# Altium PCB PCB.PcbDoc
Units mil, origin at the board's own origin, x right, y up, seen from the top; angles counter-clockwise.
Board outline 1620 x 1205 mil, 2 copper layers (Top Layer, Bottom Layer), stack 54.768 mil thick; 21 components, 14 nets, 72 pads, 112 vias.
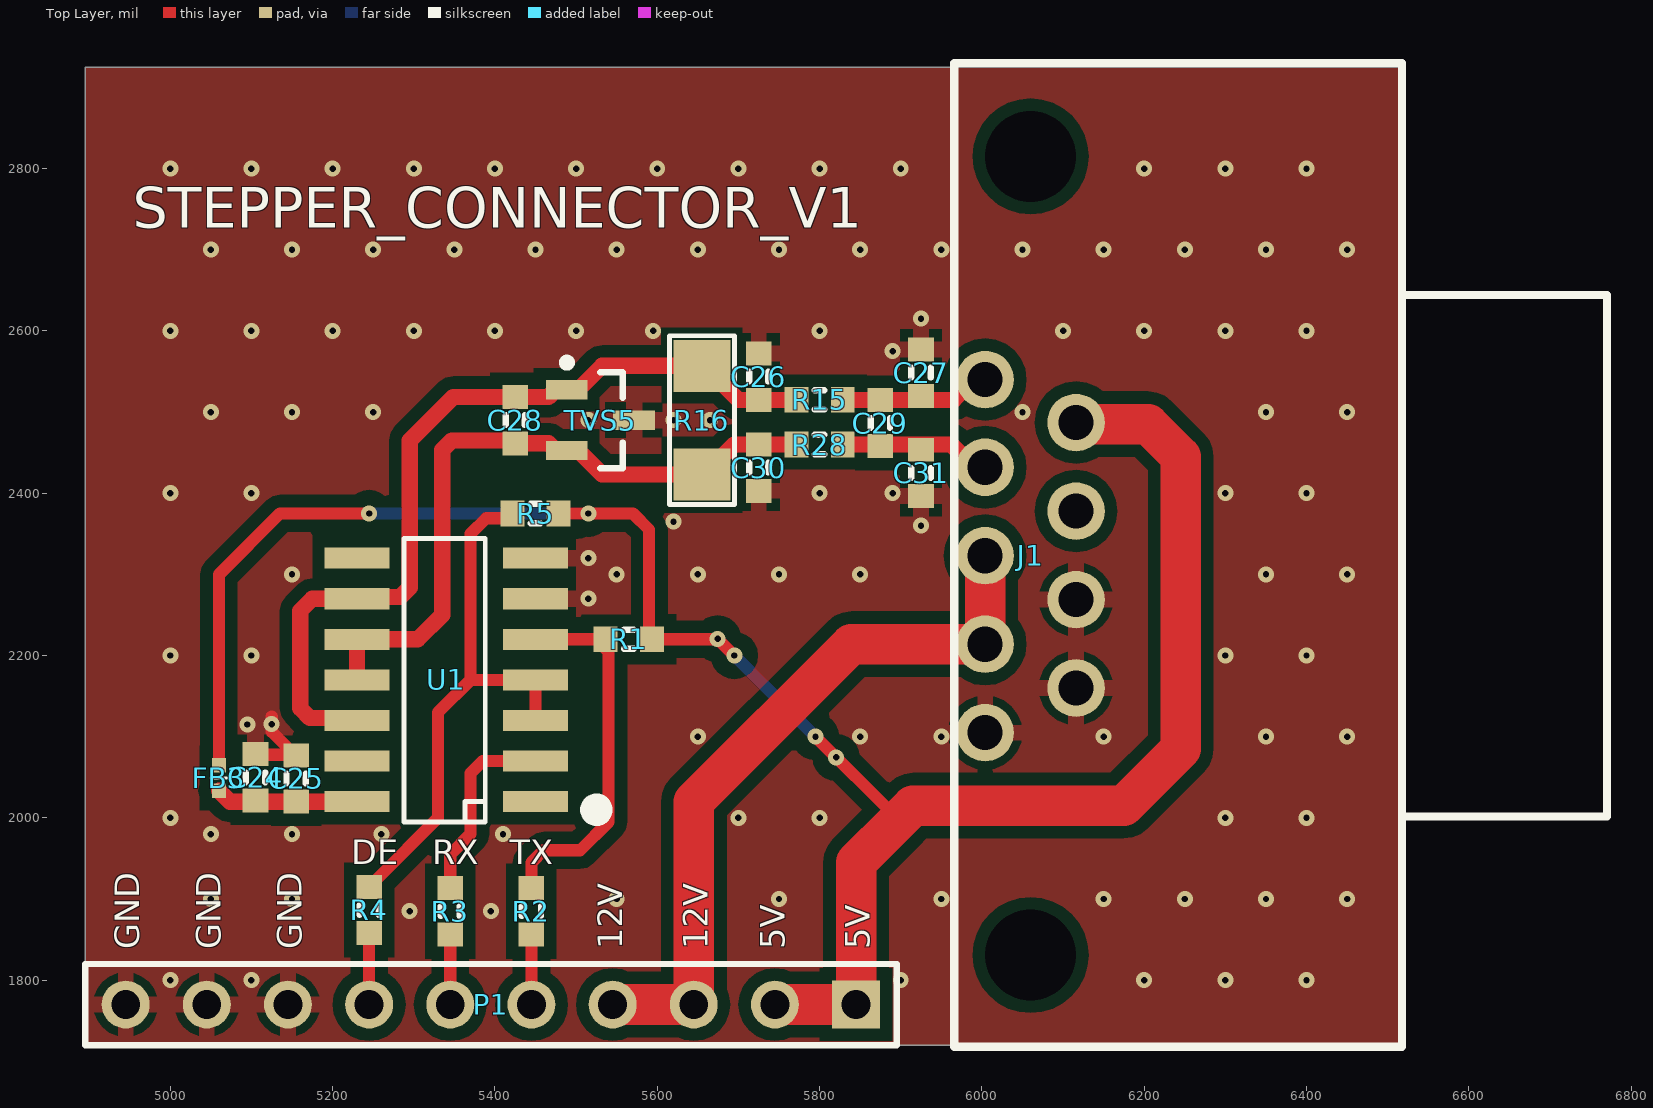
[diagram p0: Top Layer view]
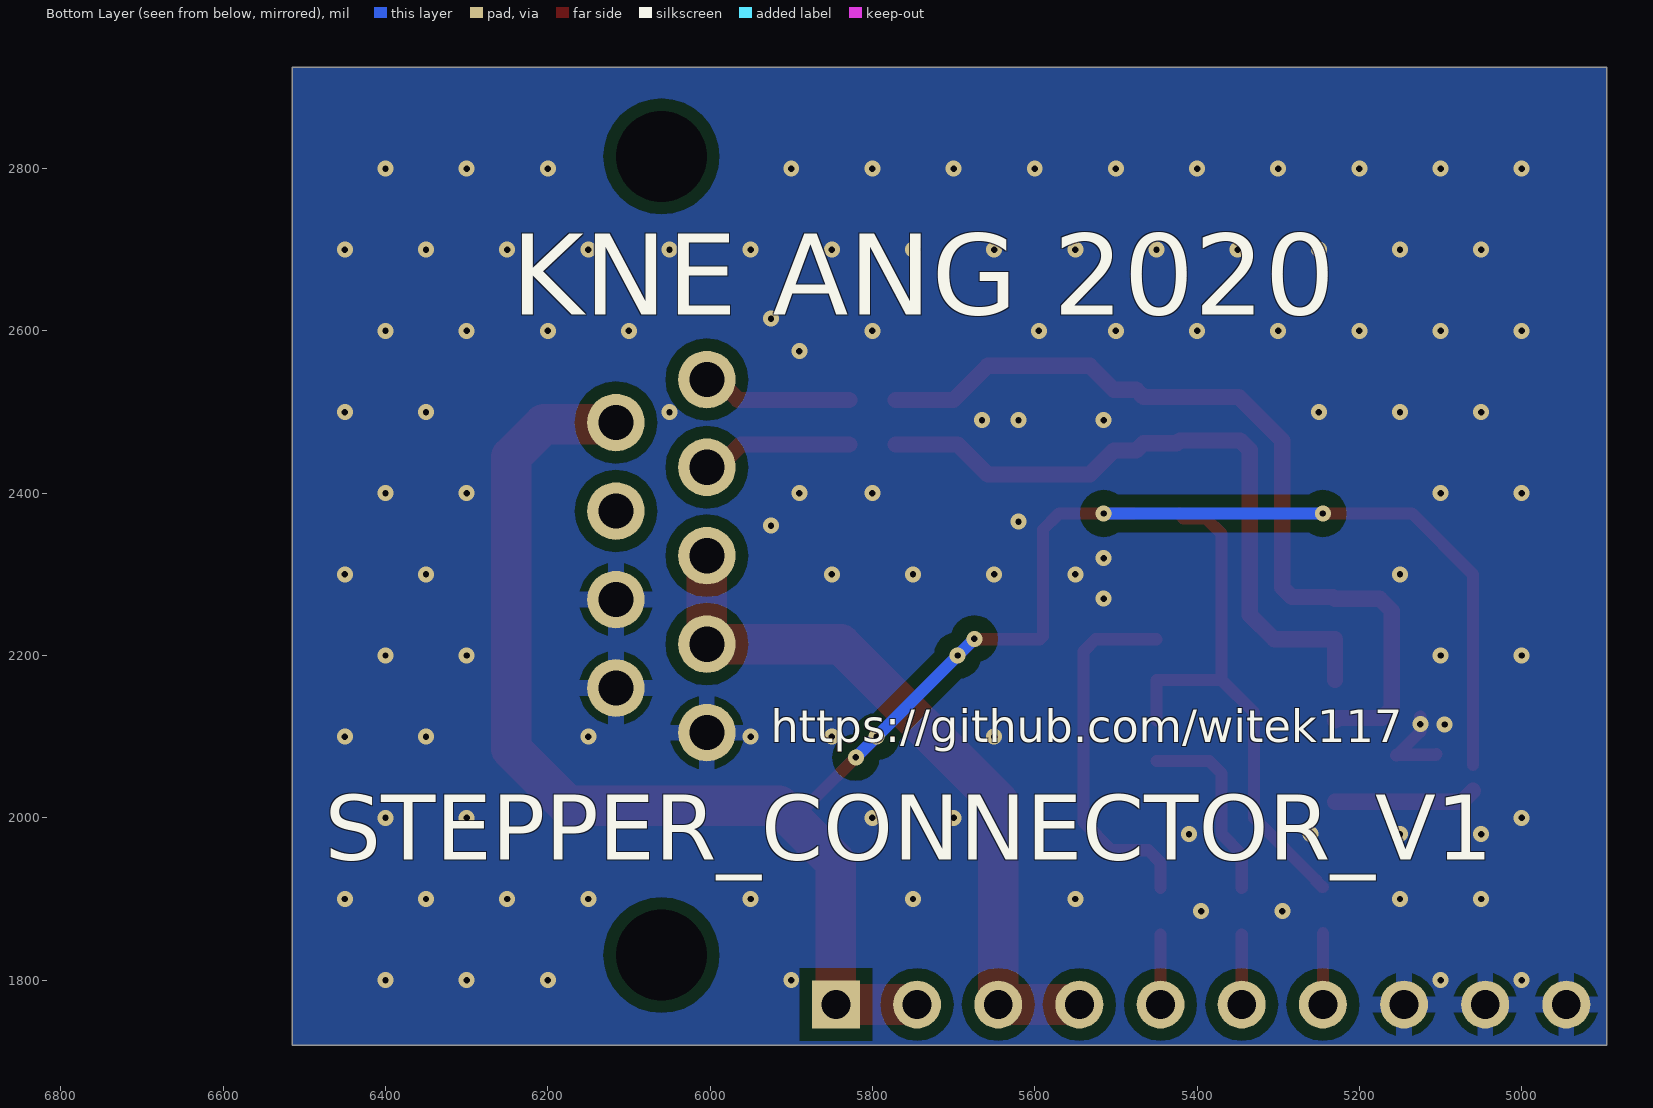
[diagram p1: Bottom Layer view, seen from below]
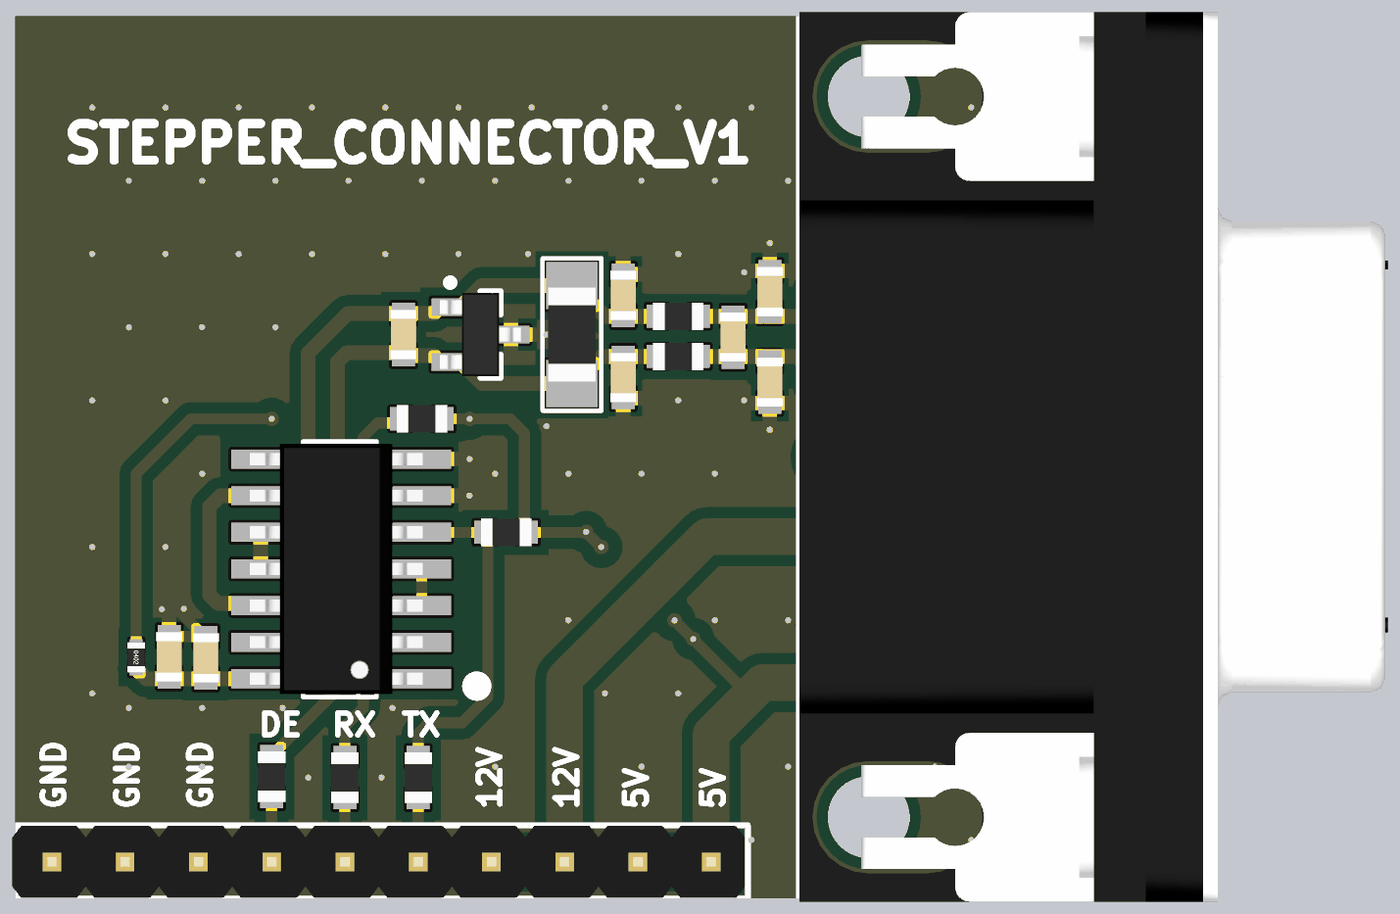
[diagram p2: 3D render of the assembled board from above, using the file's embedded part models]

## Layer stack, top to bottom
Top Solder: solder mask 0.4, Solder Resist, Dk 3.5
Top Layer: signal copper 1.4
Dielectric 1: dielectric 51.9685, FR-4, Dk 4.8
Bottom Layer: signal copper 1.4
Bottom Solder: solder mask 0.4, Solder Resist, Dk 3.5

## Board outline
4895,1720 6515,1720 6515,2925 4895,2925

## Design rules (kind name [scope] priority, off if disabled: settings)
Clearance [All] p1: gap=5 ignorepadtopadclearanceinfootprint=FALSE except(15: Arc-Poly Track-Poly SMDPad-Poly THPad-Poly Via-Poly Fill-Poly Poly-Poly Poly-Region Poly-Text Poly-Hole)
HoleSize [All] p1: absolutevalues=TRUE maxlimit=157.48 minlimit=1 maxpercent=80.000 minpercent=20.000
MinimumSolderMaskSliver [All] p1: minsoldermaskwidth=2
PolygonConnect PolygonConnect_via [IsVia] p1: connectstyle=Direct reliefconductorwidth=20 reliefentries=4 polygonreliefangle="90 Angle" airgapwidth=10
PolygonConnect [All] p2: connectstyle=Relief reliefconductorwidth=20 reliefentries=4 polygonreliefangle="90 Angle" airgapwidth=10
RoutingVias [All] p1: holewidth=28 width=50 viastyle="Through Hole" minholewidth=7.87 minwidth=19.68 maxholewidth=157.48 maxwidth=157.48
SilkToSilkClearance [All] p1: silktosilkclearance=5
SilkToSolderMaskClearance [IsPad] p1: minsilkscreentomaskgap=2 clearancetoexposedcopper=TRUE
SolderMaskExpansion [All] p1: expansion=4 istentingtop=FALSE
Width [All] p1: maxlimit=50 minlimit=6 preferedwidth=10
26 further rules are at their usual default settings.

## Classes and differential pairs
component class top: J1 P1 R1 R2 R3 R4 R5
component class Designator: C24 C25 FB3 U1

## Components (designator, comment, footprint, x,y, rotation, side; value= is the part's Value field where it differs from the comment)
C24 "Ceramic X7R" C_0603_1608 5105,2050 r90 top value=1uF
C25 "Ceramic X7R" C_0603_1608 5155,2048.54 r90 top value=100nF
C26 "Ceramic C0G" C_0603_1608 5725,2543.54 r90 top value=1nF
C27 "Ceramic C0G" C_0603_1608 5925,2548.54 r90 top value=100pF
C28 "Ceramic C0G" C_0603_1608 5425,2490 r270 top value=1nF
C29 "Ceramic C0G" C_0603_1608 5875,2486.46 r270 top value=100pF
C30 "Ceramic C0G" C_0603_1608 5725,2431.46 r270 top value=1nF
C31 "Ceramic C0G" C_0603_1608 5925,2425 r270 top value=100pF
FB3 "Ferrite bead" FB_0402_1005 5060,2049.25 r270 top value=BLM15EG121SH1D
J1 "DSUB 9 Pin" J_DSUB_MHDD9F-T-B-S-RBM 6060,2323 r90 top value=MHDD9F-T-B-S-RBM
P1 "Goldpin" P_HEADER_1x10_2.54 5845,1770 r180 top value=DS1021-1*10SF11
R1 "Resistor" R_0603_1608 5565,2220 r0 top value=100k
R2 "Resistor" R_0603_1608 5445,1885 r90 top value=10R
R3 "Resistor" R_0603_1608 5345,1885 r270 top value=10R
R4 "Resistor" R_0603_1608 5245,1886.46 r90 top value=10R
R5 "Resistor" R_0603_1608 5450,2375 r180 top value=10k
R15 "Resistor" R_0603_1608 5800,2515 r180 top value=10R
R16 "Resistor" R_1206_3216 5655,2490 r90 top value=120R
R28 "Resistor" R_0603_1608 5800,2460 r180 top value=10R
TVS5 "TVS double bidirectional" SOT23_N 5530,2490 r0 top value=CDSOT23-SM712
U1 "MAX3076 Series 16 Mbps 6 V Full Duplex SMT RS 485 Transceiver - SOIC-14" SOP14_SO14_SOIC14_4X9X18 5340,2170 r90 top value=MAX3076EASD+

## Footprints (in the part's own frame and the unit in brackets; to place one, negate y for a bottom-side part, rotate by r counter-clockwise, add the part's x,y. Pads: shape width x height; smd on the part's side, far side on the other; paste and mask are expansions set on the pad)
C_0603_1608 [mm]
  rect 0.75x0.8 smd: 1(-0.725,0) 2(0.725,0)
  silkscreen extent -0.15,-0.3 0.15,0.3, body extent -0.85,-0.45 0.85,0.45, height 0.89
FB_0402_1005 [mm]
  rect 0.45x0.45 smd: 1(-0.4,0) 2(0.4,0)
  silkscreen extent 0,-0.25 0,0.25, body extent -0.52,-0.3 0.52,0.3, height 0.34
J_DSUB_MHDD9F-T-B-S-RBM [mm] "D-SUB; 9 Position; Female"
  round 1.8 hole 1.1: 1(5.512,1.422) 2(2.769,1.422) 3(0,1.422) 4(-2.769,1.422) 5(-5.537,1.422) 6(4.166,-1.422) 7(1.397,-1.422) 8(-1.372,-1.422) 9(-4.14,-1.422)
  round 1.524 hole 2.845 unplated: DNC(-12.497,0) DNC(12.497,0)
  silkscreen extent -15.37,-18.04 15.42,2.39, body extent -15.42,-18 15.42,2.4, height 12.5
P_HEADER_1x10_2.54 [mm] "Connector; Header; 10 Position; Male"
  rect 1.5x1.5 hole 0.9: 1(0,0)
  round 1.5 hole 0.9: 2(2.54,0) 3(5.08,0) 4(7.62,0) 5(10.16,0) 6(12.7,0) 7(15.24,0) 8(17.78,0) 9(20.32,0) 10(22.86,0)
  silkscreen extent -1.27,-1.27 24.13,1.27, body extent -1.17,-1.25 24.23,1.25, height 8.2
R_0603_1608 [mm]
  rect 0.75x0.8 smd: 1(-0.725,0) 2(0.725,0)
  silkscreen extent -0.15,-0.3 0.15,0.3, body extent -0.87,-0.47 0.88,0.48, height 0.54
R_1206_3216 [mil]
  rect 64x70 smd: 1(-67,0) 2(67,0)
  silkscreen extent -104,-40 104,40, body extent -64,-32 64,32, height 27
SOP14_SO14_SOIC14_4X9X18 [mil]
  rect 26x80 smd: 1(-150,-110) 2(-100,-110) 3(-50,-110) 4(0,-110) 5(50,-110) 6(100,-110) 7(150,-110) 8(150,110) 9(100,110) 10(50,110) 11(0,110) 12(-50,110) 13(-100,110) 14(-150,110)
  silkscreen extent -175,-195 174,52, body extent -171,-111 171,125, height 67
SOT23_N [mm] "SOT23, 3-Leads, Body 2.9x1.3mm, Pitch 0.95mm, Lead Span 2.3mm, IPC Medium Density"
  rect 1.3x0.6 smd: 1(-1.05,0.95) 2(-1.05,-0.95) 3(1.05,0)
  silkscreen extent -1.17,-1.5 0.7,1.92, body extent -1.4,-1.45 1.4,1.45, height 1.29

## Part data
C24: library part C_1uF_25V_X7R_0603_10, "Capacitor", Dielectric=X7R, Manufacturer=Samsung, Manufacturer Part Number=CL10B105KA8NNNC, Tolerance (%)=10, Voltage=25V, HelpURL=http://www.tme.eu/pl/Document/4a42202b32dab16128fe107dd69598cc/samsung-chip-cap.pdf, Part Number=C_1uF_25V_X7R_0603_10, SCH_Footprint=0603, Supplier 1=TME, Supplier 2="RS Components", Supplier 3=Farnell, Supplier 4=Mouser, Supplier 5=Digi-Key, Supplier Part Number 1=CL10B105KA8NNNC
C25: library part C_100nF_50V_X7R_0603_5, "Capacitor", Dielectric=X7R, Manufacturer=Samsung, Manufacturer Part Number=CL10B104JB8NNNC, Tolerance (%)=5, Voltage=50V, HelpURL=http://www.tme.eu/pl/Document/4a42202b32dab16128fe107dd69598cc/samsung-chip-cap.pdf, Part Number=C_100nF_50V_X7R_0603_5, SCH_Footprint=0603, Supplier 1=TME, Supplier 2="RS Components", Supplier 3=Farnell, Supplier 4=Mouser, Supplier 5=Digi-Key, Supplier Part Number 1=CL10B104JB8NNNC
C26 C28 C30: library part C_1nF_50V_C0G_0603_5, "Capacitor", Dielectric=C0G, Manufacturer=Samsung, Manufacturer Part Number=CL10C102JB8NNNC, Tolerance (%)=5, Voltage=50V, HelpURL=http://www.tme.eu/pl/Document/7da762c1dbaf553c64ad9c40d3603826/mlcc_samsung.pdf, Part Number=C_1nF_50V_C0G_0603_5, SCH_Footprint=0603, Supplier 1=TME, Supplier 2="RS Components", Supplier 3=Farnell, Supplier 4=Mouser, Supplier 5=Digi-Key, Supplier Part Number 1=CL10C102JB8NNNC
C27 C29 C31: library part C_100pF_50V_C0G_0603_5, "Capacitor", Dielectric=C0G, Manufacturer=AVX, Manufacturer Part Number=06035A101JAT2A, Tolerance (%)=5, Voltage=50V, HelpURL=http://www.tme.eu/pl/Document/28556c2a4dfa60995042b7f5f1edb9ed/AVX-C0G.pdf, Part Number=C_100pF_50V_C0G_0603_5, SCH_Footprint=0603, Supplier 1=TME, Supplier 2="RS Components", Supplier 3=Farnell, Supplier 4=Mouser, Supplier 5=Digi-Key, Supplier Part Number 1=06035A101JAT2A
FB3: library part FB_BLM15EG121SH1D, "Ferrite Bead", Current=1.5A, Manufacturer=Murata, Manufacturer Part Number=BLM15EG121SH1D, Resistance=95mR, HelpURL=http://datasheet.octopart.com/BLM15EG121SH1D-Murata-datasheet-37129980.pdf, Part Number=FB_BLM15EG121SH1D, SCH_Footprint=0402, Supplier 1=TME, Supplier 2="RS Components", Supplier 3=Farnell, Supplier 4=Mouser, Supplier 5=Digi-Key, Supplier Part Number 4=81-BLM15EG121SH1D, Supplier Part Number 5=490-17344-1-ND
J1: library part J_DSUB, "Header, 9-Pin", Manufacturer=-, Manufacturer Part Number=MHDD9F-T-B-S-RBM, Component Type=Standard, HelpURL=https://www.tme.eu/Document/d24efe21bdaa08410b5ca50a678e1de1/MHDDXX-F-T-B-S-RBM.PDF, Part Number=J_DSUB, SCH_Footprint=J_DSUB, Supplier 1=TME, Supplier 2="RS Components", Supplier 3=Farnell, Supplier 4=Mouser, Supplier 5=Digi-Key, Supplier Part Number 1=MHDD9F-T-B-S-RBM, Supplier Part Number 3=2533067
P1: library part P_HEADER_1x10_2.54, "Pin Header", Manufacturer=Connfly, Manufacturer Part Number=DS1021-1*10SF11, Supplier Part Number 1=ZL201-10G, Component Type=Standard, HelpURL=http://www.tme.eu/en/Document/cc301e58a5da78cb543a94b5a5b7f06a/DS1021.pdf, Part Number=P_HEADER_1x10_2.54, SCH_Footprint="1x10 2.54mm", Supplier 1=TME, Supplier 2="RS Components", Supplier 3=Farnell, Supplier 4=Mouser, Supplier 5=Digi-Key
R1: library part R_100k_0603_1, Manufacturer=Royalohm, Manufacturer Part Number=0603SAF1003T5E, Power=100mW, Supplier Part Number 1=SMD0603-100K-1%, Tolerance=1%, Voltage=50V, HelpURL=http://www.tme.eu/pl/Document/b315665a56acbc42df513c99b390ad98/ROYALOHM-THICKFILM.pdf, Part Number=R_100k_0603_1, SCH_Footprint=0603, Supplier 1=TME, Supplier 2="RS Components", Supplier 3=Farnell, Supplier 4=Mouser, Supplier 5=Digi-Key, Supplier Part Number 4=667-ERJ-3EKF1003V, Supplier Part Number 5=P100KHCT-ND
R2 R3 R4 R15 R28: library part R_10R_0603_1, Manufacturer=Royalohm, Manufacturer Part Number=0603SAF100JT5E, Power=100mW, Supplier Part Number 1=SMD0603-10R-1%, Tolerance=1%, Voltage=50V, HelpURL=http://www.tme.eu/pl/Document/b315665a56acbc42df513c99b390ad98/ROYALOHM-THICKFILM.pdf, Part Number=R_10R_0603_1, SCH_Footprint=0603, Supplier 1=TME, Supplier 2="RS Components", Supplier 3=Farnell, Supplier 4=Mouser, Supplier 5=Digi-Key
R5: library part R_10k_0603_1, Manufacturer=Vishay, Manufacturer Part Number=CRCW060310K0FKTABC, Power=100mW, Tolerance=1%, Voltage=75V, HelpURL=http://www.tme.eu/pl/Document/622e28308c06d160637f2b14751ba16b/Data%20Sheet%20CRCW_BCe3.pdf, Part Number=R_10k_0603_1, SCH_Footprint=0603, Supplier 1=TME, Supplier 2="RS Components", Supplier 3=Farnell, Supplier 4=Mouser, Supplier 5=Digi-Key, Supplier Part Number 1=CRCW060310K0FKTABC, Supplier Part Number 4=667-ERJ-3EKF1002V, Supplier Part Number 5=P10KGCT-ND
R16: library part R_120R_1206_1, Manufacturer=Vishay, Manufacturer Part Number=CRCW1206120RFKEA, Power=250mW, Tolerance=1%, Voltage=200V, HelpURL=http://www.farnell.com/datasheets/2310790.pdf, Part Number=R_120R_1206_1, SCH_Footprint=1206, Supplier 1=TME, Supplier 2="RS Components", Supplier 3=Farnell, Supplier 4=Mouser, Supplier 5=Digi-Key, Supplier Part Number 2=6791787, Supplier Part Number 3=1653057, Supplier Part Number 4=71-CRCW1206-120-E3, Supplier Part Number 5=541-120FCT-ND
TVS5: library part TVS_CDSOT23-SM712, Current=17A, Manufacturer=Bourns, Manufacturer Part Number=CDSOT23-SM712, Voltage=12V, HelpURL=https://datasheet.octopart.com/CDSOT23-SM712-Bourns-datasheet-13451680.pdf, Part Number=TVS_CDSOT23-SM712, SCH_Footprint=SOT23, Supplier 1=TME, Supplier 2="RS Components", Supplier 3=Farnell, Supplier 4=Mouser, Supplier 5=Digi-Key, Supplier Part Number 2=7673728, Supplier Part Number 3=1824869, Supplier Part Number 4=652-CDSOT23-SM712, Supplier Part Number 5=CDSOT23-SM712CT-ND
U1: library part U_MAX3076EASD+, "RS-485/RS-422 Transceivers, +3.3V,  ±15kV ESD-Protected, Fail-Safe, Hot-Swap", Manufacturer="Maxim Integrated", Manufacturer Part Number=MAX3076EASD+, HelpURL=https://sigma.octopart.com/138901689/technical_drawing/Maxim-Integrated-MAX3076EASD%2B.pdf, Part Number=U_MAX3076EASD+, SCH_Footprint=SO14, Supplier 1=TME, Supplier 2="RS Components", Supplier 3=Farnell, Supplier 4=Mouser, Supplier 5=Digi-Key, Supplier Part Number 3=2511650, Supplier Part Number 4=700-MAX3076EASD, Supplier Part Number 5=MAX3076EASD+-ND

## Via types
v1: diameter 19.68, hole 7.87, Top Layer to Bottom Layer, tented both sides, 112 vias

## Nets (pads, with @x,y where several pads share a name; then routed paths per layer and width w, separated by ;. In a path a pad name is that pad's centre, name@x,y a point inside that pad or via, vN(x,y) a via of type N, cw(c..) or ccw(c..) an arc to the next point about the centre after c; other vN are vias at no path point)
12V: J1.3 J1.4 P1.3 P1.4 | length 898.4
  Top Layer w50: P1.4 P1.3 5645,2020 5839,2214 J1.4 J1.3
+5V: FB3.1 J1.6 P1.1 P1.2 R1.2 R5.1 | length 2679.4
  Top Layer w15: FB3.1 5060,2300 5135,2375 v1(5245,2375) ; R5.1 v1(5515,2375) 5570,2375 5590,2355 5590,2223.54 R1.2 5675,2220 v1(5695,2200) ; v1(5795,2100) 5895,2000 5895,1995
  Top Layer w50: P1.2 P1.1 5845,1945 5895,1995 5915,2015 6175,2015 6245,2085 6245,2445 6205,2485 6118,2485 J1.6
  Bottom Layer w15: v1(5245,2375) v1(5515,2375) ; v1(5674.47,2220.53) v1(5695,2200) v1(5795,2100) v1(5820.53,2074.47)
GND: C24.2 C25.2 C26.2 C27.2 C30.2 C31.2 J1.5 J1.8 J1.9 P1.8 P1.9 P1.10 TVS5.3 U1.6 U1.7 | length 111.5
  Top Layer w15: C24.2 5105.73,2077.82 C25.2@5153.29,2077.82 ; v1@5125,2125 5125,2106.1 C25.2@5153.29,2077.82 ; C25.2@5153.29,2077.82 5154.27,2077.82 C25.2 5154.02,2077.09 C25.2@5153.29,2077.82
  other v1: 5000,1800 5100,1800 5900,1800 6200,1800 6300,1800 6400,1800 5295,1885 5395,1885 5050,1900 5150,1900 5550,1900 5750,1900 5950,1900 6150,1900 6250,1900 6350,1900 6450,1900 5050,1980 5150,1980 5260,1980 5410,1980 5000,2000 5700,2000 5800,2000 6300,2000 6400,2000 5650,2100 5850,2100 5950,2100 6150,2100 6350,2100 6450,2100 5095,2115 5125,2115.55 5000,2200 5100,2200 6300,2200 6400,2200 5515,2270 5150,2300 5550,2300 5650,2300 5750,2300 5850,2300 6350,2300 6450,2300 5515,2320 5925,2360 5620,2365 5000,2400 5100,2400 5800,2400 5890,2400 6300,2400 6400,2400 5515,2490 5620,2490 5665,2490 5050,2500 5150,2500 5250,2500 6050,2500 6350,2500 6450,2500 5890,2575 5000,2600 5100,2600 5200,2600 5300,2600 5400,2600 5500,2600 5595,2600 5800,2600 6100,2600 6200,2600 6300,2600 6400,2600 5925,2615 5050,2700 5150,2700 5250,2700 5350,2700 5450,2700 5550,2700 5650,2700 5750,2700 5850,2700 5950,2700 6050,2700 6150,2700 6250,2700 6350,2700 6450,2700 5000,2800 5100,2800 5200,2800 5300,2800 5400,2800 5500,2800 5600,2800 5700,2800 5800,2800 5900,2800 6200,2800 6300,2800 6400,2800
NetC24_1: C24.1 C25.1 FB3.2 U1.14 | length 175.6
  Top Layer w20: FB3.2 5073.5,2020 C25.1 U1.14
NetC26_1: C26.1 C28.1 R15.2 R16.2 TVS5.1 U1.9 U1.12 | length 1056.3
  Top Layer w20: U1.12 5227,2123 5172,2123 5160,2135 5160,2255 5175,2270 U1.9 5232.14,2272.14 5283.28,2272.14 5295,2283.86 5295,2465 5348.54,2518.54 C28.1 5466.02,2518.54 5474.88,2527.4 TVS5.1 5502.44,2527.4 5532.04,2557 R16.2 5658,2557 5700,2515 C26.1 R15.2
NetC28_2: C28.2 C30.1 R16.1 R28.2 TVS5.2 U1.10 U1.11 | length 844.7
  Top Layer w20: U1.11 U1.10 5305,2220 5335,2250 5335,2453.28 5346.72,2465 5421.46,2465 C28.2 5466.02,2461.46 5474.88,2452.6 TVS5.2 5502.44,2452.6 5532.04,2423 R16.1 5658,2423 5695,2460 C30.1 R28.2
NetR1_1: R1.1 R2.2 U1.5 | length 453.4
  Top Layer w15: R2.2 5445,1945 5460,1960 5505,1960 5540,1995 5540,2205 5525,2220 U1.5
NetR3_1: R3.1 U1.2 | length 238
  Top Layer w15: R3.1 5345,1955 5370,1980 5370,2055 5385,2070 U1.2
NetR4_2: R4.2 R5.2 U1.3 U1.4 | length 679.7
  Top Layer w15: R4.2 5245.98,1915 5253.25,1922.26 5253.25,1923.25 5330,2000 5330,2130 5370,2170 ; R5.2 5421.46,2374.02 5416.69,2369.25 5389.25,2369.25 5370,2350 5370,2170 ; U1.3 U1.4 5370,2170
RS485HD_TXD+: C27.1 C29.1 J1.1 R15.1 | length 185.8
  Top Layer w20: R15.1 C29.1 5965.24,2515 5990.24,2540 J1.1
RS485HD_TXD-: C29.2 C31.1 J1.2 R28.1 | length 187.1
  Top Layer w20: R28.1 5962.24,2460 5990.24,2432 J1.2
USART1_DE: P1.7 R4.1 | length 87.9
  Top Layer w15: P1.7 R4.1
USART1_RX: P1.6 R3.2 | length 86.5
  Top Layer w15: P1.6 R3.2
USART1_TX: P1.5 R2.1 | length 86.5
  Top Layer w15: P1.5 R2.1
pads on no net: J1.7 J1.DNC U1.1 U1.8 U1.13

## Polygon pours and split planes (outlines as drawn)
GND on Top Layer "NONET_L02_P-001" (solid, remove dead copper, pour order 0): 4895,1720 6515,1720 6515,2925 4895,2925
GND on Bottom Layer "NONET_L02_P-001" (solid, remove dead copper, pour order 1): 4895,1720 6515,1720 6515,2925 4895,2925

## Silkscreen, mask and mechanical layers (free items; w line width, h text height)
Top Overlay:
  text "STEPPER_CONNECTOR_V1" at 4954,2727.33 h50
  text "DE" at 5223,1943 h30
  text "RX" at 5323,1943 h30
  text "TX" at 5418,1943 h30
  text "GND" at 4962,1838 h30 r90
  text "GND" at 5062,1838 h30 r90
  text "GND" at 5162,1838 h30 r90
  text "12V" at 5557,1838 h30 r90
  text "12V" at 5662,1838 h30 r90
  text "5V" at 5757,1838 h30 r90
  text "5V" at 5862,1838 h30 r90
Bottom Overlay:
  text "KNE ANG 2020" at 6245,2620 h100
  text "https://github.com/witek117" at 5925,2093.33 h40
  text "STEPPER_CONNECTOR_V1" at 6475,1948.33 h80
Mechanical 1:
  the board outline again, w10

## Text inside footprints (layer, text, board x,y; h text height)
C24: Mechanical 17 "d" at 5110,2015 h10 r90; Mechanical 19 "-" at 5110,2015 h10 r90
C25: Mechanical 17 "d" at 5160,2013.54 h10 r90; Mechanical 19 "-" at 5160,2013.54 h10 r90
C26: Mechanical 17 "d" at 5730,2508.54 h10 r90; Mechanical 19 "-" at 5730,2508.54 h10 r90
C27: Mechanical 17 "d" at 5930,2513.54 h10 r90; Mechanical 19 "-" at 5930,2513.54 h10 r90
C28: Mechanical 17 "d" at 5420,2525 h10 r270; Mechanical 19 "-" at 5420,2525 h10 r270
C29: Mechanical 17 "d" at 5870,2521.46 h10 r270; Mechanical 19 "-" at 5870,2521.46 h10 r270
C30: Mechanical 17 "d" at 5720,2466.46 h10 r270; Mechanical 19 "-" at 5720,2466.46 h10 r270
C31: Mechanical 17 "d" at 5920,2460 h10 r270; Mechanical 19 "-" at 5920,2460 h10 r270
FB3: Mechanical 17 "d" at 5055.08,2064.38 h10 r270; Mechanical 19 "-" at 5055,2064.25 h10 r270
J1: Mechanical 17 "d" at 6093,2034 h60 r90; Mechanical 19 "-" at 6230,2041 h60 r90
P1: Mechanical 17 "d" at 5635,1785 h40 r180; Mechanical 19 "-" at 5575,1790 h40 r180
R1: Mechanical 17 "d" at 5535,2225 h10; Mechanical 19 "-" at 5535,2205 h10
R2: Mechanical 17 "d" at 5440,1855 h10 r90; Mechanical 19 "-" at 5460,1855 h10 r90
R3: Mechanical 17 "d" at 5350,1915 h10 r270; Mechanical 19 "-" at 5330,1915 h10 r270
R4: Mechanical 17 "d" at 5240,1856.46 h10 r90; Mechanical 19 "-" at 5260,1856.46 h10 r90
R5: Mechanical 17 "d" at 5480,2370 h10 r180; Mechanical 19 "-" at 5480,2390 h10 r180
R15: Mechanical 17 "d" at 5830,2510 h10 r180; Mechanical 19 "-" at 5830,2530 h10 r180
R16: Mechanical 17 "d" at 5680,2425 h10 r90; Mechanical 19 "-" at 5680,2425 h10 r90
R28: Mechanical 17 "d" at 5830,2455 h10 r180; Mechanical 19 "-" at 5830,2475 h10 r180
TVS5: Mechanical 17 "d" at 5525,2535 h15 r270; Mechanical 19 "-" at 5525,2535 h15 r270
U1: Mechanical 17 "d" at 5355,2005 h20 r90; Mechanical 19 "-" at 5355,2005 h20 r90